# Altium PCB WMR_V2_PCB.PcbDoc
Units mil, origin at the board's own origin, x right, y up, seen from the top; angles counter-clockwise.
Board outline 6692.91 x 6692.91 mil, 2 copper layers (Top Layer, Bottom Layer); 24 components, 29 nets, 171 pads, 7 vias.
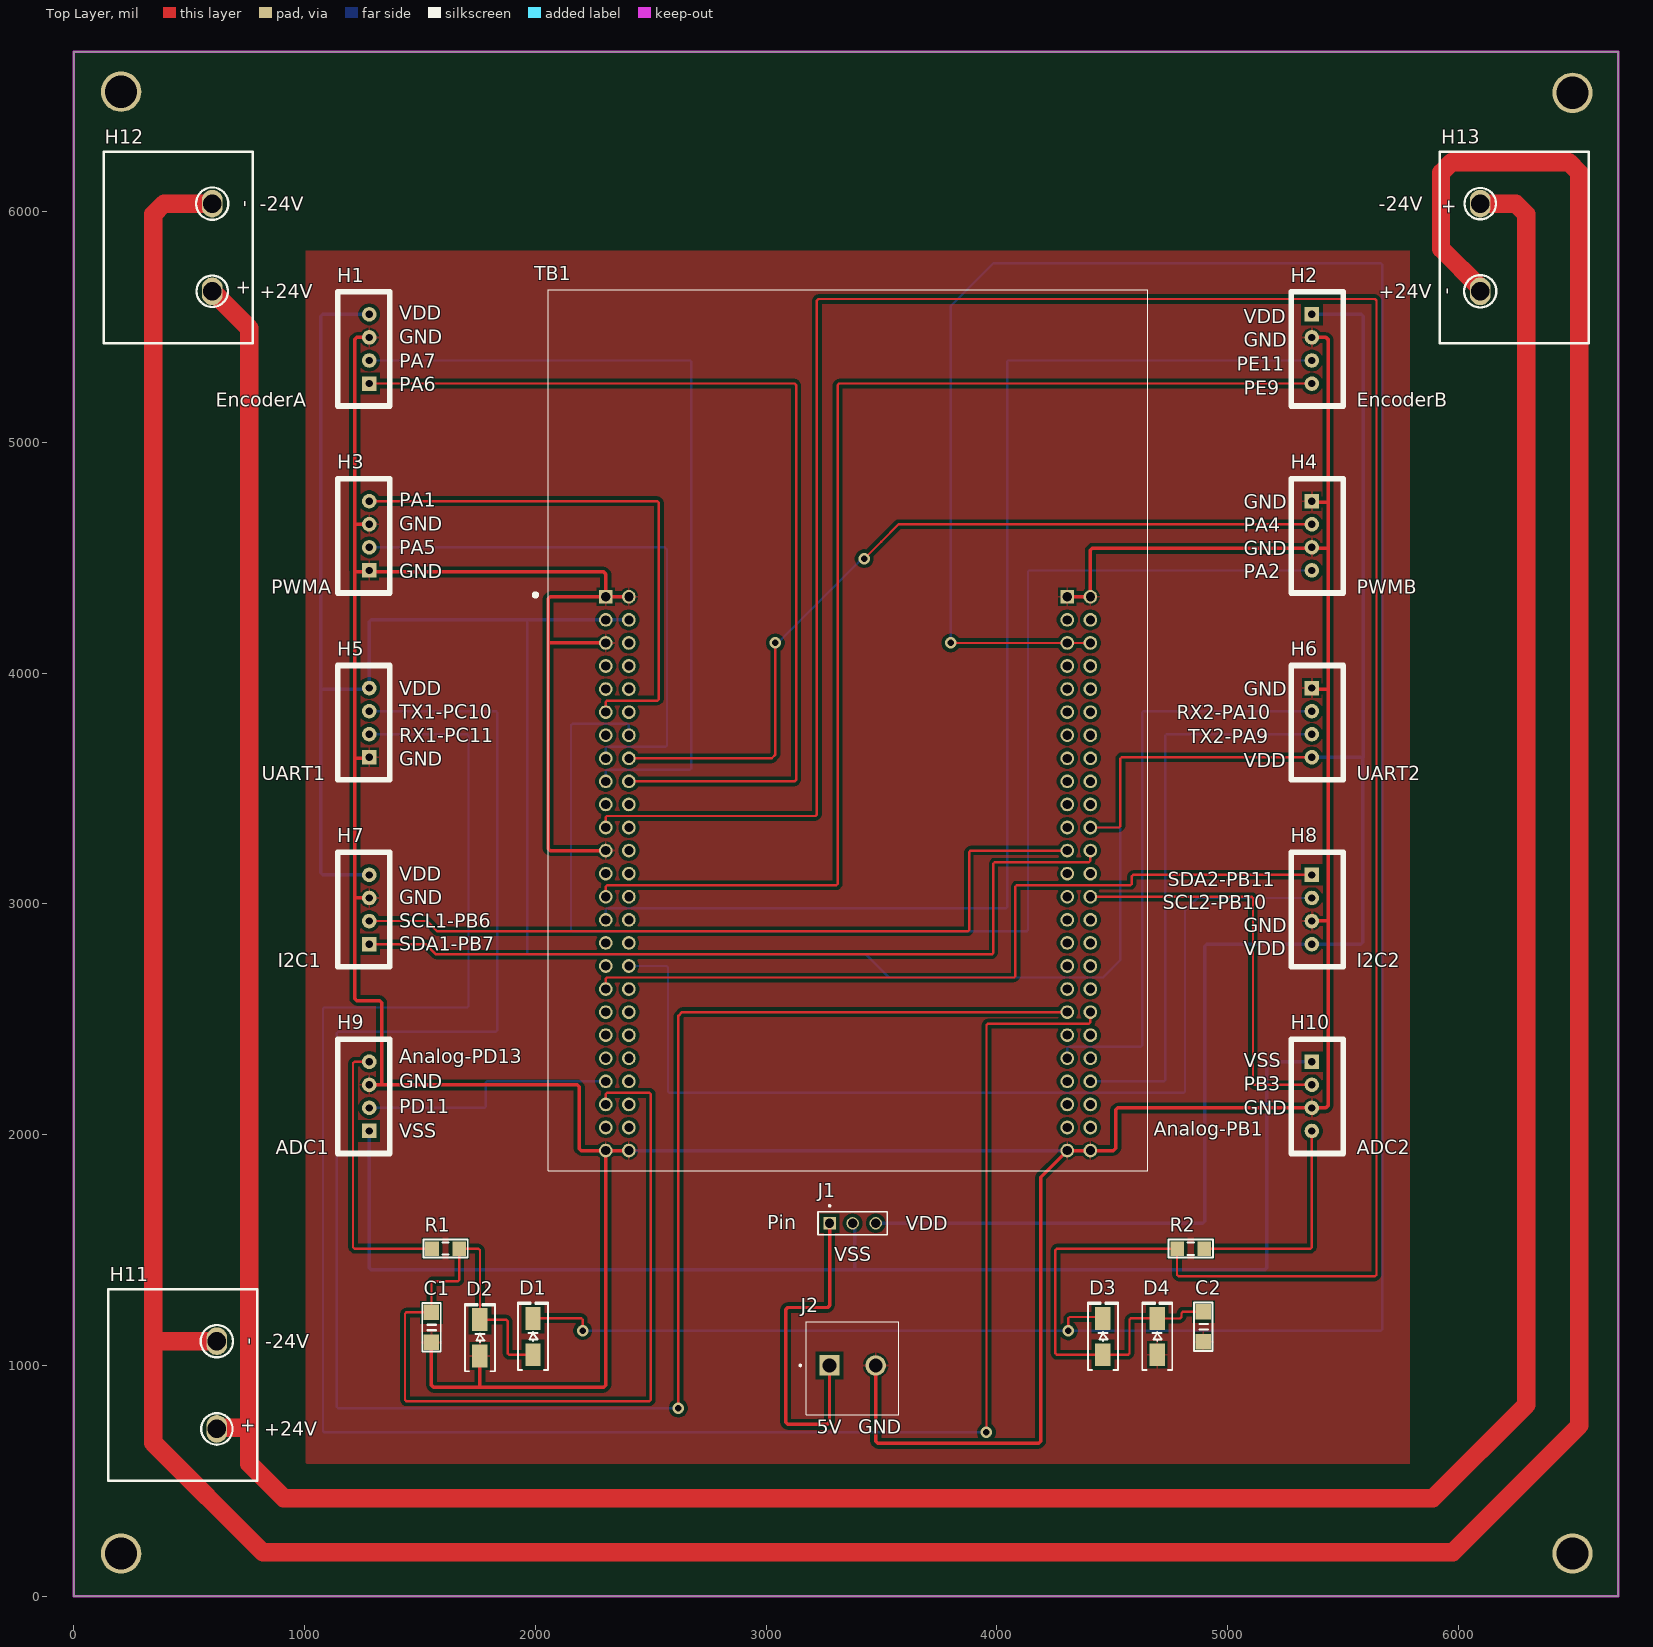
[diagram p0: Top Layer view]
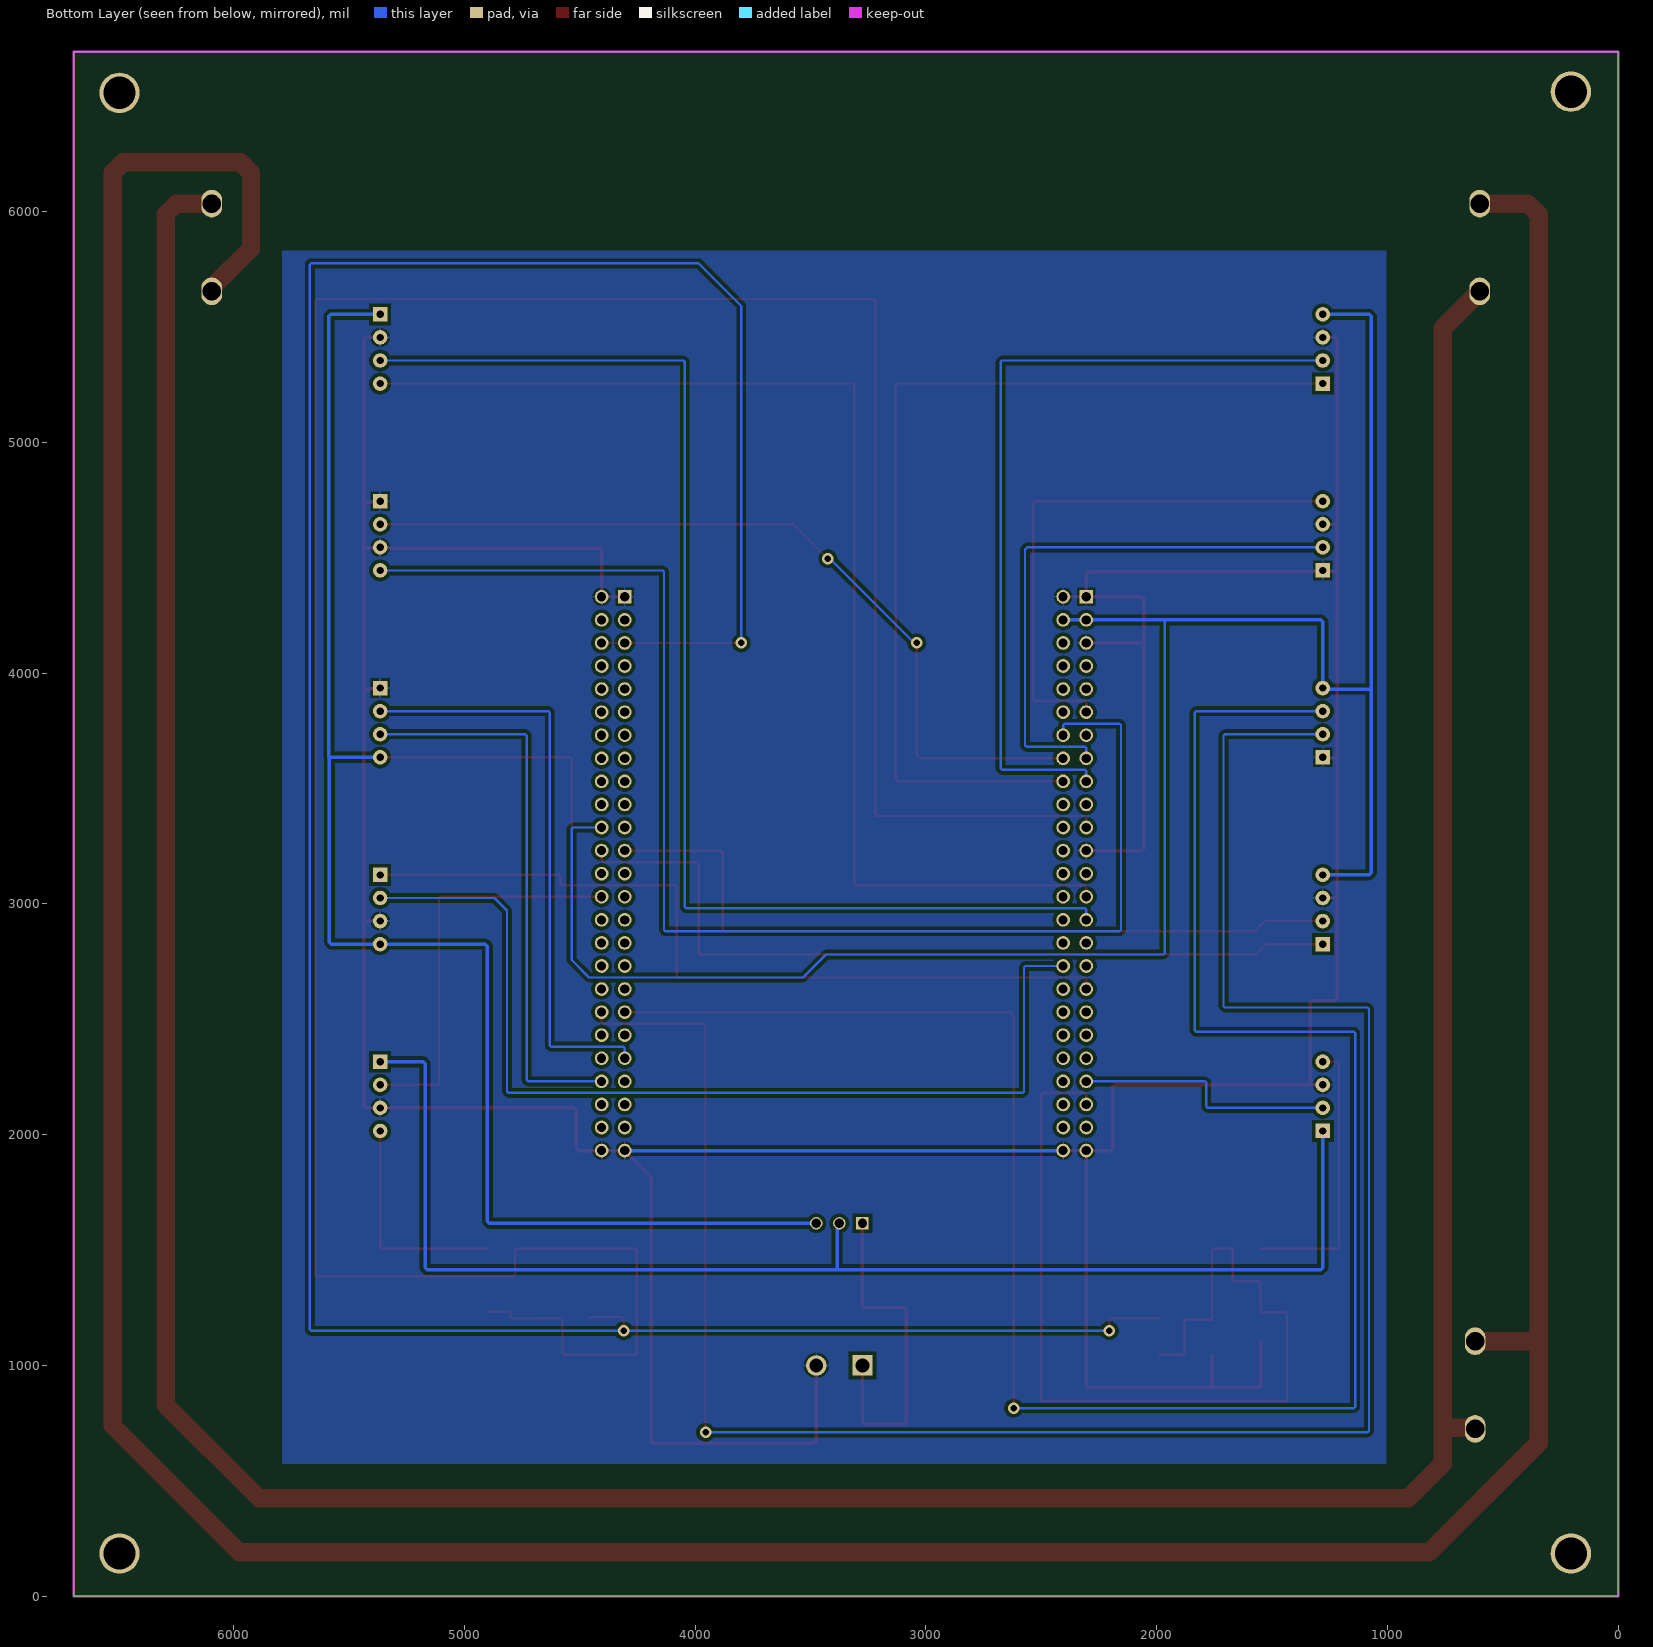
[diagram p1: Bottom Layer view, seen from below]
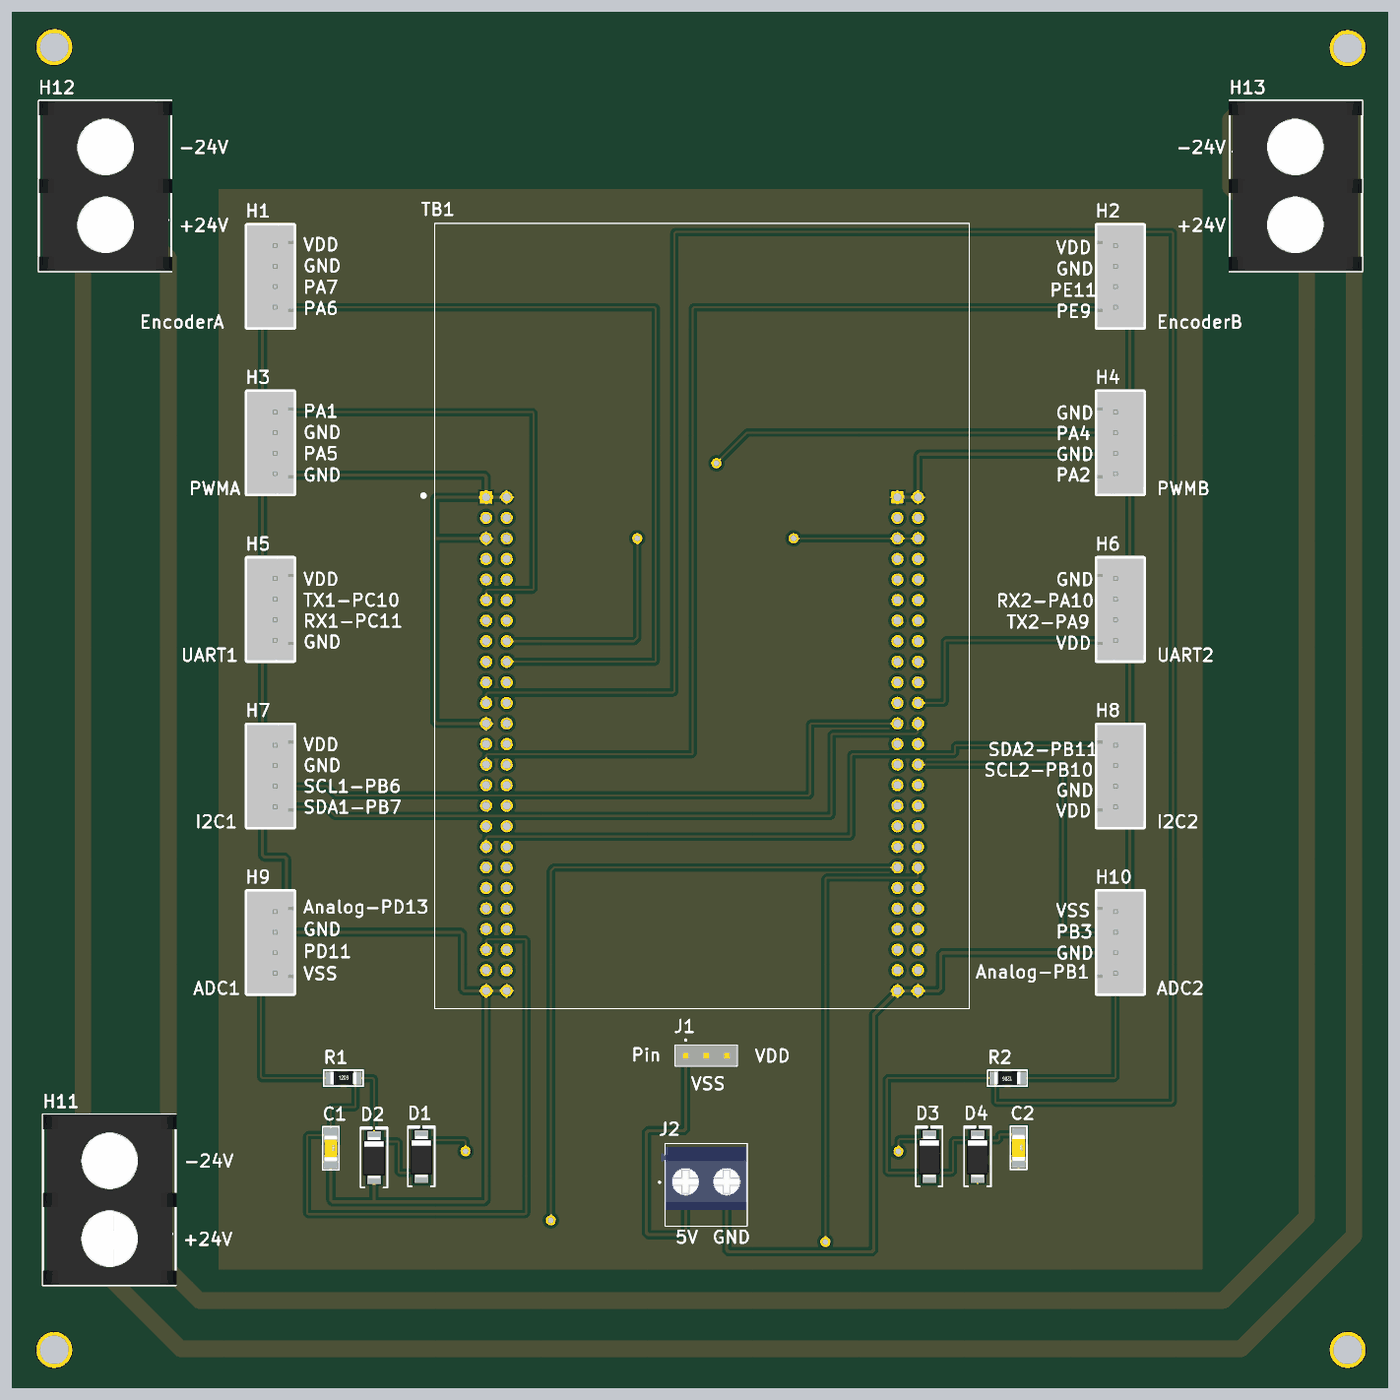
[diagram p2: 3D render of the assembled board from above, using the file's embedded part models]

## Layer stack, top to bottom
Top Solder: solder mask 0.4, Solder Resist, Dk 3.5
Top Layer: signal copper 1.4
Dielectric 1: dielectric 12.6, FR-4, Dk 4.8
Bottom Layer: signal copper 1.4
Bottom Solder: solder mask 0.4, Solder Resist, Dk 3.5

## Board outline
0,0 0,6692.91 6692.91,6692.91 6692.91,0

## Design rules (kind name [scope] priority, off if disabled: settings)
Clearance [All] p1: gap=15 ignorepadtopadclearanceinfootprint=FALSE
PolygonConnect [All] p1: connectstyle=Relief reliefconductorwidth=10 reliefentries=4 polygonreliefangle="90 Angle" airgapwidth=10
RoutingVias [All] p1: holewidth=28 width=50 viastyle="Through Hole" minholewidth=28 minwidth=50 maxholewidth=28 maxwidth=50
SolderMaskExpansion [All] p1: expansion=4 istentingtop=FALSE
Width [All] p1: maxlimit=80 minlimit=10 preferedwidth=15
30 further rules are at their usual default settings.

## Components (designator, comment, footprint, x,y, rotation, side; value= is the part's Value field where it differs from the comment)
C1 "100nF" "Cap 1206" 1550,1165 r270 top
C2 "100nF" "Cap 1206" 4895,1167.64 r270 top
D1 "SS14" "DIODE SMA" 1990,1125 r90 top
D2 "SS14" "DIODE SMA" 1760,1120 r90 top
D3 "SS14" "DIODE SMA" 4460,1125 r90 top
D4 "SS14" "DIODE SMA" 4695,1125 r90 top
H1 "EncoderA" XH2.54M-4 1280.34,5255.04 r90 top
H2 "EncoderB" XH2.54M-4 5365.34,5555.04 r270 top
H3 "PWMA" XH2.54M-4 1280.34,4445.33 r90 top
H4 "PWMB" XH2.54M-4 5365.34,4745.33 r270 top
H5 "UART1" XH2.54M-4 1280.34,3635.61 r90 top
H6 "UART2" XH2.54M-4 5365.34,3935.61 r270 top
H7 "I2C1" XH2.54M-4 1280.34,2825.9 r90 top
H8 "I2C2" XH2.54M-4 5365.34,3125.9 r270 top
H9 "ADC1" XH2.54M-4 1280.34,2016.19 r90 top
H10 "ADC2" XH2.54M-4 5365.34,2316.19 r270 top
H11 "24V Vin" barrier_terminal 620,915 r90 top
H12 "H-Bridge 1" barrier_terminal 600,5845 r90 top
H13 "H-Bridge 2" barrier_terminal 6095,5845 r270 top
J1 "" SAMTEC_TSW-101-07-G-T-LL 3275.34,1616.19 r270 top
J2 "" MULTICOMP_MC000048 3375,1000 r0 top
R1 "470" "tro smd 1206" 1611.28,1506.19 r0 top
R2 "470" "tro smd 1206" 4840.34,1506.19 r180 top
TB1 "STM32F4DISCOVERY" MODULE_STM32F4DISCOVERY 3355.34,3753.23 r0 top

## Footprints (in the part's own frame and the unit in brackets; to place one, negate y for a bottom-side part, rotate by r counter-clockwise, add the part's x,y. Pads: shape width x height; smd on the part's side, far side on the other; paste and mask are expansions set on the pad)
barrier_terminal [mil]
  oval 120x90 hole 80: +(-190,0) -(190,0)
  silkscreen extent -415,-175 415,470, body extent -414,-180 414,470, height 728
"Cap 1206" [mm]
  rect 1.7x1.7 smd: 1(-1.65,0) 2(1.65,0)
  silkscreen extent -2.67,-1.02 2.67,1.02, body extent -1.6,-0.8 1.6,0.8, height 1.02
"DIODE SMA" [mm] "SMA"
  rect 2.5x1.7 smd: 1(-2,0) 2(2,0)
  silkscreen extent -3.68,-1.65 3.75,1.65, body extent -2.6,-1.37 2.6,1.37, height 2.4
MODULE_STM32F4DISCOVERY [mm]
  rect 1.508x1.508 hole 1: P1_1(-26.67,14.68) P2_1(24.13,14.68)
  round 1.508 hole 1: P1_2(-24.13,14.68) P1_3(-26.67,12.14) P1_4(-24.13,12.14) P1_5(-26.67,9.6) P1_6(-24.13,9.6) P1_7(-26.67,7.06) P1_8(-24.13,7.06) P1_9(-26.67,4.52) P1_10(-24.13,4.52) P1_11(-26.67,1.98) P1_12(-24.13,1.98) P1_13(-26.67,-0.56) P1_14(-24.13,-0.56) P1_15(-26.67,-3.1) P1_16(-24.13,-3.1) P1_17(-26.67,-5.64) P1_18(-24.13,-5.64) P1_19(-26.67,-8.18) P1_20(-24.13,-8.18) P1_21(-26.67,-10.72) P1_22(-24.13,-10.72) P1_23(-26.67,-13.26) P1_24(-24.13,-13.26) P1_25(-26.67,-15.8) P1_26(-24.13,-15.8) P1_27(-26.67,-18.34) P1_28(-24.13,-18.34) P1_29(-26.67,-20.88) P1_30(-24.13,-20.88) P1_31(-26.67,-23.42) P1_32(-24.13,-23.42) P1_33(-26.67,-25.96) P1_34(-24.13,-25.96) P1_35(-26.67,-28.5) P1_36(-24.13,-28.5) P1_37(-26.67,-31.04) P1_38(-24.13,-31.04) P1_39(-26.67,-33.58) P1_40(-24.13,-33.58) P1_41(-26.67,-36.12) P1_42(-24.13,-36.12) P1_43(-26.67,-38.66) P1_44(-24.13,-38.66) P1_45(-26.67,-41.2) P1_46(-24.13,-41.2) P1_47(-26.67,-43.74) P1_48(-24.13,-43.74) P1_49(-26.67,-46.28) P1_50(-24.13,-46.28) P2_2(26.67,14.68) P2_3(24.13,12.14) P2_4(26.67,12.14) P2_5(24.13,9.6) P2_6(26.67,9.6) P2_7(24.13,7.06) P2_8(26.67,7.06) P2_9(24.13,4.52) P2_10(26.67,4.52) P2_11(24.13,1.98) P2_12(26.67,1.98) P2_13(24.13,-0.56) P2_14(26.67,-0.56) P2_15(24.13,-3.1) P2_16(26.67,-3.1) P2_17(24.13,-5.64) P2_18(26.67,-5.64) P2_19(24.13,-8.18) P2_20(26.67,-8.18) P2_21(24.13,-10.72) P2_22(26.67,-10.72) P2_23(24.13,-13.26) P2_24(26.67,-13.26) P2_25(24.13,-15.8) P2_26(26.67,-15.8) P2_27(24.13,-18.34) P2_28(26.67,-18.34) P2_29(24.13,-20.88) P2_30(26.67,-20.88) P2_31(24.13,-23.42) P2_32(26.67,-23.42) P2_33(24.13,-25.96) P2_34(26.67,-25.96) P2_35(24.13,-28.5) P2_36(26.67,-28.5) P2_37(24.13,-31.04) P2_38(26.67,-31.04) P2_39(24.13,-33.58) P2_40(26.67,-33.58) P2_41(24.13,-36.12) P2_42(26.67,-36.12) P2_43(24.13,-38.66) P2_44(26.67,-38.66) P2_45(24.13,-41.2) P2_46(26.67,-41.2) P2_47(24.13,-43.74) P2_48(26.67,-43.74) P2_49(24.13,-46.28) P2_50(26.67,-46.28)
  silkscreen extent -34.61,-48.5 33,48.5
MULTICOMP_MC000048 [mm]
  rect 2.25x2.25 / inner round 2.25 / far side rect 2.25x2.25 hole 1.5: 1(-2.54,0)
  round 2.25 hole 1.5: 2(2.54,0)
  silkscreen extent -5.85,-5.4 5.08,4.8, body extent -5.5,-3.43 5,4.37, height 4
SAMTEC_TSW-101-07-G-T-LL [mm]
  rect 1.37x1.37 hole 1.02: 01(0,0)
  round 1.37 hole 1.02: 02(0,2.54) 03(0,5.08)
  silkscreen extent -2.02,-1.27 1.27,6.35, body extent -1.27,-1.27 1.27,6.35, height 8.38
"tro smd 1206" [mm]
  rect 1.5x1.6 smd: 1(-1.5,0) 2(1.5,0)
  silkscreen extent -2.44,-0.99 2.44,0.99, body extent -1.6,-0.8 1.6,0.8, height 0.6
XH2.54M-4 [mm]
  rect 1.6x1.6 hole 0.8: 1(0,0)
  round 1.6 hole 0.8: 2(2.54,0) 3(5.08,0) 4(7.62,0)
  silkscreen extent -2.48,-2.26 10.1,3.46, body extent -2.48,-2.26 10.1,3.48, height 6.91

## Part data
C1 C2: library part "Cap 1206", "Capacitor SMD 1206"
D1 D2 D3 D4: library part "Diode SS14 ( 1N5819)", "Dán", Chung_Loai=Dán, Don_Vi=Con, Ma_Hang=MH002211, Ten_Linh_Kien="Diode SS14 DO214 Schottky 1A 40V ( 1N5819 DO214)"
H1 H2 H3 H4 H5 H6 H7 H8 H9 H10: library part "Header 4P 2.54 Duc Thang", "Cắm", Chung_Loai=Cắm, Don_Vi=Con, Ma_Hang=MH001285, Ten_Linh_Kien="Header 4P XH2.54-4P Đực Thẳng"
H11 H12 H13: library part "Barrier Terminal"
J1: library part TSW-101-07-G-T-LL, Package=None, Availability=Unavailable, MP=TSW-101-07-G-T-LL, Price=None
J2: library part MC000048, "TERMINAL BLOCK, PCB, 2WAY, 26-12AWG; Connector Type: PCB Terminal Block; Connector Mounting: PCB; Pitch Spacing: 5.08...", Package=None, Check_prices=https://www.snapeda.com/parts/MC000048/Multicomp/view-part/?ref=eda, MF=Multicomp, MP=MC000048, SnapEDA_Link=https://www.snapeda.com/parts/MC000048/Multicomp/view-part/?ref=snap
R1 R2: library part "Tro 1206 1% 470k", "Dán", Chung_Loai=Dán, Don_Vi=Con, Ma_Hang=MH005899, So_Chan=2, Ten_Linh_Kien="Trở 1206 5% 470k"
TB1: "Development kit: ARM ST; pin strips, pin header; No.of", Package=None, Availability=Unavailable, MP=STM32F4DISCOVERY, Price=None

## Free pads (board coordinates)
  round 175 hole 140: 3(205,185) 3(205,6520) 3(6495,185) 3(6495,6515)

## Via types
v1: diameter 50, hole 28, Top Layer to Bottom Layer, 7 vias

## Nets (pads, with @x,y where several pads share a name; then routed paths per layer and width w, separated by ;. In a path a pad name is that pad's centre, name@x,y a point inside that pad or via, vN(x,y) a via of type N, cw(c..) or ccw(c..) an arc to the next point about the centre after c; other vN are vias at no path point)
3V3: D1.2 D3.2 TB1.P2_5 TB1.P2_6 | length 12571.2
  Top Layer w10: D1.2 1991.26,1205 2199.48,1205 2205.34,1199.14 v1(2205.34,1151.19) ; v1(3800.34,4131.19) TB1.P2_6 ; v1(4310,1150) 4310,1204.14 4315.86,1210 4453.74,1210 D3.2
  Bottom Layer w10: v1(2205.34,1151.19) 2205.93,1150.59 4309.41,1150.59 v1(4310,1150) 5664.14,1150 5670,1155.86 5670,5770.33 5664.14,5776.19 3985.34,5776.19 3800.34,5591.19 v1(3800.34,4131.19)
5V: J1.01 J2.1 | length 1485.9
  Top Layer w15: J2.1 3275,753.79 3266.21,745 3093.79,745 3085,753.79 3085,1242.4 3093.79,1251.19 3266.55,1251.19 3275.34,1259.97 J1.01
Do1: H9.2 TB1.P1_43 | length 1133.1
  Bottom Layer w10: H9.2 1779.48,2116.19 1785.34,2122.04 1785.34,2225.33 1791.2,2231.19 TB1.P1_43
Do2: H10.2 TB1.P2_28 | length 1768.1
  Top Layer w10: TB1.P2_28 5104.48,3031.19 5110.34,3025.33 5110.34,2222.04 5116.2,2216.19 H10.2
EncA1: H1.2 TB1.P1_17 | length 3580.8
  Bottom Layer w10: H1.2 2670.62,5355.04 2676.48,5349.19 2676.48,3587.04 2670.62,3581.19 2311.2,3581.19 2305.34,3575.33 TB1.P1_17
EncA2: H1.1 TB1.P1_18 | length 4292
  Top Layer w10: H1.1 3124.48,5255.04 3130.34,5249.19 3130.34,3537.04 3124.48,3531.19 TB1.P1_18
EncB1: H2.3 TB1.P1_29 | length 5473.6
  Bottom Layer w10: TB1.P1_29 2305.34,2975.33 2311.2,2981.19 4039.48,2981.19 4045.34,2987.04 4045.34,5349.19 4051.2,5355.04 H2.3
EncB2: H2.4 TB1.P1_27 | length 5273.6
  Top Layer w10: TB1.P1_27 2305.34,3075.33 2311.2,3081.19 2470.34,3081.19 3304.48,3081.19 3310.34,3087.04 3310.34,5249.19 3316.2,5255.04 H2.4
GND: C1.2 C2.2 D2.1 D4.1 H1.3 H2.2 H3.1 H3.3 H4.1 H4.3 H5.1 H6.1 H7.3 H8.3 H9.3 H10.3 J2.2 TB1.P1_1 TB1.P1_2 TB1.P1_5 TB1.P1_23 TB1.P1_49 TB1.P1_50 TB1.P2_1 TB1.P2_2 TB1.P2_49 TB1.P2_50 | length 20734
  Top Layer w15: H9.3 1334.33,2216.19 ; H7.3 1280.05,3026.19 1217.84,3026.19 ; H5.1@1280.34,3631.19 1217.84,3631.19 ; H3.3 1279.48,4646.19 1217.55,4646.19 ; H1.3 1226.34,5455.04 1217.55,5446.26 1217.55,4646.19 ; C1.2 1550,913.79 1558.79,905 1760,905 ; D2.1 1760,905 ; TB1.P1_23 2064.12,3231.19 2055.34,3239.97 2055.34,4131.19 ; TB1.P1_5 2055.34,4131.19 ; TB1.P1_50 TB1.P1_49 ; TB1.P1_2 TB1.P1_1 ; J2.2 3475.34,999.66 3475.34,671.29 3484.12,662.5 4181.21,662.5 4190,671.29 4190,1815.85 TB1.P2_49 TB1.P2_50 4505.34,1931.19 4515.34,1941.19 4515.34,2107.4 4524.12,2116.19 H10.3 5426.55,2116.19 5435.34,2124.97 5435.34,2926.19 ; TB1.P2_1 TB1.P2_2 4405.34,4532.4 4414.12,4541.19 5361.19,4541.19 H4.3 5369.48,4541.19 5435.34,4541.19 ; H8.3 5365.62,2926.19 5435.34,2926.19 ; H6.1@5365.34,3931.19 5431.55,3931.19 5435.34,3927.4 5435.34,2926.19 ; H4.1 5369.48,4741.19 5435.34,4741.19 ; H2.2 5426.55,5455.04 5435.34,5446.26 5435.34,4741.19 ; 5435.34,3931.19 5435.34,4541.19 ; 1217.55,4646.19 1217.55,4444.36 1222.23,4439.68 ; 1217.84,3026.19 1217.84,2590.1 1226.62,2581.31 1325.55,2581.31 1334.33,2572.53 1334.33,2216.19 ; 1217.84,3026.19 1217.84,3631.19 ; 1217.84,3631.19 1217.84,4439.68 1222.23,4439.68 ; 1222.23,4439.68 1279.34,4439.68 1280.34,4438.69 2296.55,4438.69 2305.34,4429.9 TB1.P1_1 ; 1334.33,2216.19 2181.55,2216.19 2190.34,2207.4 2190.34,1939.97 2199.12,1931.19 TB1.P1_49 ; 1760,905 2296.55,905 2305.34,913.79 TB1.P1_49 ; 2055.34,4131.19 2055.34,4322.4 2064.12,4331.19 TB1.P1_1 ; 5435.34,4541.19 5435.34,4741.19
  Bottom Layer w15: TB1.P1_50 TB1.P2_49
NetH11_+: H11.+ H12.+ H13.+ | length 16431
  Top Layer w80: H12.+ 760,5495 760,730 ; H11.+ 620,725.38 624.62,730 760,730 ; H13.+ 6248.14,6035 6295,5988.14 6295,830 5890,425 910,425 760,575 760,730
NetH11_-: H11.- H12.- H13.- | length 19128.3
  Top Layer w80: H12.- 391.59,6035 344.72,5988.14 344.72,1105 ; H11.- 344.72,1105 ; H13.- 6095,5670 5925,5840 5925,6168.14 5971.86,6215 6478.14,6215 6525,6168.14 6525,740 5975,190 820,190 344.72,665.28 344.72,1105
PWMA1: H3.4 TB1.P1_11 | length 2388.8
  Top Layer w10: H3.4 2529.48,4745.33 2535.34,4739.47 2535.34,3887.04 2529.48,3881.19 2311.2,3881.19 2305.34,3875.33 TB1.P1_11
PWMA2: H3.2 TB1.P1_15 | length 2456.9
  Bottom Layer w10: H3.2 2561.19,4545.33 2570.34,4536.19 2570.34,3686.73 2564.48,3680.87 2311.2,3680.87 2305.34,3675.01 TB1.P1_15
PWMB1: H4.2 TB1.P1_16 | length 3663.7
  Top Layer w10: TB1.P1_16 3024.48,3631.19 3040.34,3647.04 v1(3040.34,4131.19) ; v1(3425.34,4496.19) 3498.74,4569.58 3574.48,4645.33 H4.2
  Bottom Layer w10: v1(3040.34,4131.19) 3050.34,4131.19 3415.34,4496.19 v1(3425.34,4496.19)
PWMB2: H4.4 TB1.P1_14 | length 5956.4
  Bottom Layer w10: TB1.P1_14 2405.34,3775.01 2399.48,3780.87 2160.88,3780.87 2155.02,3775.01 2155.02,2887.36 2160.88,2881.5 4129.48,2881.5 4135.34,2887.36 4135.34,4439.47 4141.2,4445.33 H4.4
RX1: H5.2 TB1.P2_38 | length 9211.9
  Top Layer w10: v1(3955,710) 3955,2475.33 3960.86,2481.19 4399.48,2481.19 4405.34,2487.04 TB1.P2_38
  Bottom Layer w10: H5.2 1704.48,3735.61 1710.34,3729.76 1710.34,2557.04 1704.48,2551.19 1085.86,2551.19 1080,2545.33 1080,715.86 1085.86,710 v1(3955,710)
RX2: H6.2 TB1.P2_41 | length 2554.1
  Bottom Layer w10: TB1.P2_41 4305.34,2375.64 4311.2,2381.5 4624.48,2381.5 4630.34,2387.36 4630.34,3829.76 4636.2,3835.61 H6.2
SCL1: H7.2 TB1.P2_23 | length 3386.7
  Top Layer w10: H7.2 1530.62,2925.9 1575.34,2881.19 3874.48,2881.19 3880.34,2887.04 3880.34,3225.33 3886.2,3231.19 TB1.P2_23
SCL2: H8.2 TB1.P1_34 | length 4312.4
  Bottom Layer w10: TB1.P1_34 2569.48,2731.19 2575.34,2725.33 2575.34,2187.04 2581.2,2181.19 4809.48,2181.19 4815.34,2187.04 4815.34,2971.19 4870.05,3025.9 H8.2
SDA1: H7.1 TB1.P2_24 | length 3582.6
  Top Layer w10: H7.1 1525.62,2825.9 1570.02,2781.5 3979.17,2781.5 3985.02,2787.36 3985.02,3175.01 3990.88,3180.87 4399.17,3180.87 4405.34,3187.04 TB1.P2_24
SDA2: H8.1 TB1.P1_35 | length 3537.9
  Top Layer w10: TB1.P1_35 2305.34,2672.34 2305.34,2675.64 2307.3,2678.29 cw(c2315.34,2672.34) 2310.33,2681 2310.65,2681.19 4074.48,2681.19 4080.34,2687.04 4080.34,3075.33 4086.2,3081.19 4579.48,3081.19 4585.34,3087.04 4585.34,3120.04 4591.2,3125.9 H8.1
TX1: H5.3 TB1.P2_37 | length 9129.3
  Top Layer w10: v1(2620,815) 2620,2514.99 2636.2,2531.19 TB1.P2_37
  Bottom Layer w10: H5.3 1829.48,3835.61 1835.34,3829.76 1835.34,2452.04 1829.48,2446.19 1145.86,2446.19 1140,2440.33 1140,820.86 1145.86,815 v1(2620,815)
TX2: H6.3 TB1.P2_44 | length 2457.6
  Bottom Layer w10: TB1.P2_44 4724.48,2231.19 4730.34,2237.04 4730.34,3729.76 4736.2,3735.61 H6.3
VDD: H1.4 H2.1 H5.4 H6.4 H7.4 H8.4 J1.03 TB1.P1_3 TB1.P1_4 TB1.P2_22 | length 16985.2
  Top Layer w10: TB1.P2_22 4529.48,3331.19 4535.34,3337.04 4535.34,3629.76 4541.2,3635.61 H6.4
  Bottom Layer w10: 1965.34,4231.19 1965.34,2786.73 1971.2,2780.87 3432.86,2780.87 3532.23,2681.5 4459.8,2681.5 4535.34,2757.04 4535.34,3325.33 4529.48,3331.19 TB1.P2_22
  Bottom Layer w15: H7.4 1079.12,3125.9 1070.34,3134.69 1070.34,3931.19 ; H1.4 1079.12,5555.04 1070.34,5546.26 1070.34,3931.19 ; TB1.P1_4 TB1.P1_3 1965.34,4231.19 1289.12,4231.19 1280.34,4222.4 H5.4 1275.91,3931.19 1070.34,3931.19 ; J1.03 4891.55,1616.19 4900.34,1624.97 4900.34,2817.11 4909.12,2825.9 H8.4 5576.21,2825.9 5585,2834.69 5585,3635.61 ; H6.4 5587.12,3635.61 5587.12,5546.26 5578.34,5555.04 H2.1
Vo1: C1.1 D1.1 D2.2 R1.2 TB1.P1_45 | length 4289
  Top Layer w10: D1.1 1885.86,1046.26 1880,1052.12 1880,1192.88 1874.14,1198.74 D2.2 1760,1500.33 1754.14,1506.19 R1.2 1670.34,1370.86 1664.48,1365 1555.86,1365 1550,1359.14 C1.1 1440.86,1229.96 1435,1224.1 1435,850.86 1440.86,845 2494.48,845 2500.34,850.86 2500.34,2175.64 2494.48,2181.5 2311.2,2181.5 2305.34,2175.64 TB1.P1_45
Vo1_t: H9.4 R1.1 | length 1215
  Top Layer w10: H9.4 1216.2,2316.19 1210.34,2310.33 1210.34,1512.04 1216.2,1506.19 R1.1
Vo2: C2.1 D3.1 D4.2 R2.2 TB1.P1_21 | length 12624.1
  Top Layer w10: TB1.P1_21 2305.34,3375.33 2311.2,3381.19 3214.48,3381.19 3220.34,3387.04 3220.34,5615.33 3226.2,5621.19 5639.14,5621.19 5645,5615.33 5645,1392.04 5639.14,1386.19 4787.14,1386.19 4781.28,1392.04 R2.2 4259.6,1506.19 4253.74,1500.33 4253.74,1052.12 4259.6,1046.26 D3.1 4569.14,1046.26 4575,1052.12 4575,1199.14 4580.86,1205 4693.74,1205 D4.2 4794.14,1203.74 4800,1209.6 4800,1226.74 4805.86,1232.6 C2.1
Vo2_t: H10.4 R2.1 | length 972.5
  Top Layer w10: R2.1 5359.48,1506.19 5365.34,1512.04 H10.4
VSS: H9.1 H10.1 J1.02 | length 5777.1
  Bottom Layer w15: H9.1 1280.34,1423.79 1289.12,1415 3385,1415 ; J1.02 3382.79,1608.74 3382.79,1590.14 3385,1587.93 3385,1415 ; H10.1 5179.12,2316.19 5170.34,2307.4 5170.34,1423.79 5161.55,1415 3385,1415
pads on no net: TB1.P1_6 TB1.P1_7 TB1.P1_8 TB1.P1_9 TB1.P1_10 TB1.P1_12 TB1.P1_13 TB1.P1_19 TB1.P1_20 TB1.P1_22 TB1.P1_24 TB1.P1_25 TB1.P1_26 TB1.P1_28 TB1.P1_30 TB1.P1_31 TB1.P1_32 TB1.P1_33 TB1.P1_36 TB1.P1_37 TB1.P1_38 TB1.P1_39 TB1.P1_40 TB1.P1_41 TB1.P1_42 TB1.P1_44 TB1.P1_46 TB1.P1_47 TB1.P1_48 TB1.P2_3 TB1.P2_4 TB1.P2_7 TB1.P2_8 TB1.P2_9 TB1.P2_10 TB1.P2_11 TB1.P2_12 TB1.P2_13 TB1.P2_14 TB1.P2_15 TB1.P2_16 TB1.P2_17 TB1.P2_18 TB1.P2_19 TB1.P2_20 TB1.P2_21 TB1.P2_25 TB1.P2_26 TB1.P2_27 TB1.P2_29 TB1.P2_30 TB1.P2_31 TB1.P2_32 TB1.P2_33 TB1.P2_34 TB1.P2_35 TB1.P2_36 TB1.P2_39 TB1.P2_40 TB1.P2_42 TB1.P2_43 TB1.P2_45 TB1.P2_46 TB1.P2_47 TB1.P2_48

## Polygon pours and split planes (outlines as drawn)
GND on Top Layer "GND_L01_P000" (solid, pour order 0): 1004.99,5829.99 5790,5830.01 5790,575.02 1005.01,574.99
GND on Bottom Layer "GND_L02_P004" (solid, pour order 4): 1004.99,5829.99 5790,5830.01 5790,575.02 1005.01,574.99

## Keep-outs
Keep-Out Layer:
  the board outline again, w10

## Silkscreen, mask and mechanical layers (free items; w line width, h text height)
Top Overlay:
  text "-24V" at 805,6005 h60
  text "-24V" at 5655,6005 h60
  text "+24V" at 805,5625 h60
  text "+24V" at 5655,5625.33 h60
  text "VDD" at 1410,5531.19 h60
  text "VDD" at 5069.87,5517.02 h60
  text "GND" at 1410,5427.85 h60
  text "GND" at 5069.87,5413.69 h60
  text "PA7" at 1410,5324.52 h60
  text "PE11" at 5039.88,5310.35 h60
  text "PA6" at 1410,5221.19 h60
  text "PE9" at 5069.87,5207.02 h60
  text "EncoderA" at 615,5155 h60
  text "EncoderB" at 5560,5155 h60
  text "PA1" at 1410,4721.19 h60
  text "GND" at 5069.87,4712.93 h60
  text "GND" at 1410,4617.85 h60
  text "PA4" at 5069.87,4612.35 h60
  text "PA5" at 1410,4514.52 h60
  text "GND" at 5069.87,4511.77 h60
  text "GND" at 1410,4411.19 h60
  text "PA2" at 5069.87,4411.19 h60
  text "PWMA" at 854.92,4345 h60
  text "PWMB" at 5560,4345 h60
  text "VDD" at 1410,3904.07 h60
  text "GND" at 5069.87,3902.93 h60
  text "TX1-PC10" at 1410,3802.4 h60
  text "RX2-PA10" at 4779.97,3799.59 h60
  text "RX1-PC11" at 1410,3700.74 h60
  text "TX2-PA9" at 4829.95,3696.26 h60
  text "GND" at 1410,3599.07 h60
  text "VDD" at 5069.87,3592.93 h60
  text "UART1" at 814.94,3535 h60
  text "UART2" at 5560,3535 h60
  text "VDD" at 1410,3099.77 h60
  text "SDA2-PB11" at 4739.98,3076.19 h60
  text "GND" at 1410,2998.58 h60
  text "SCL2-PB10" at 4719.99,2976.77 h60
  text "SCL1-PB6" at 1410,2897.38 h60
  text "GND" at 5069.87,2877.35 h60
  text "SDA1-PB7" at 1410,2796.19 h60
  text "VDD" at 5069.87,2777.93 h60
  text "I2C1" at 884.91,2725 h60
  text "I2C2" at 5560,2725 h60
  text "Analog-PD13" at 1410,2309.99 h60
  text "VSS" at 5069.87,2292.93 h60
  text "GND" at 1410,2201.9 h60
  text "PB3" at 5069.87,2189.59 h60
  text "PD11" at 1410,2094.05 h60
  text "GND" at 5069.87,2086.26 h60
  text "Analog-PB1" at 4680,1994.99 h60
  text "VSS" at 1410,1986.19 h60
  text "ADC1" at 874.92,1915 h60
  text "ADC2" at 5560,1915 h60
  text "Pin" at 3005.34,1591.19 h60
  text "VDD" at 3605.34,1586.19 h60
  text "VSS" at 3295.34,1451.19 h60
  text "-24V" at 830,1075 h60
  text "5V" at 3220,705 h60
  text "GND" at 3400,705 h60
  text "+24V" at 825,695 h60

## Text inside footprints (layer, text, board x,y; h text height)
H11: Top Overlay "+" at 780,705 h60 r90; Top Overlay "-" at 784.99,1090 h60 r90
H12: Top Overlay "+" at 760,5635 h60 r90; Top Overlay "-" at 764.99,6020 h60 r90
H13: Top Overlay "-" at 5930.01,5670 h60 r270; Top Overlay "+" at 5935,6055 h60 r270